# Altium PCB MotorBoard.PcbDoc
Units mm, origin at the board's own origin, x right, y up, seen from the top; angles counter-clockwise.
Board outline 85 x 80 mm, 4 copper layers (Top Layer, Gnd, DC Power, Bottom Layer), stack 1.782 mm thick; 113 components, 64 nets, 317 pads, 104 vias.
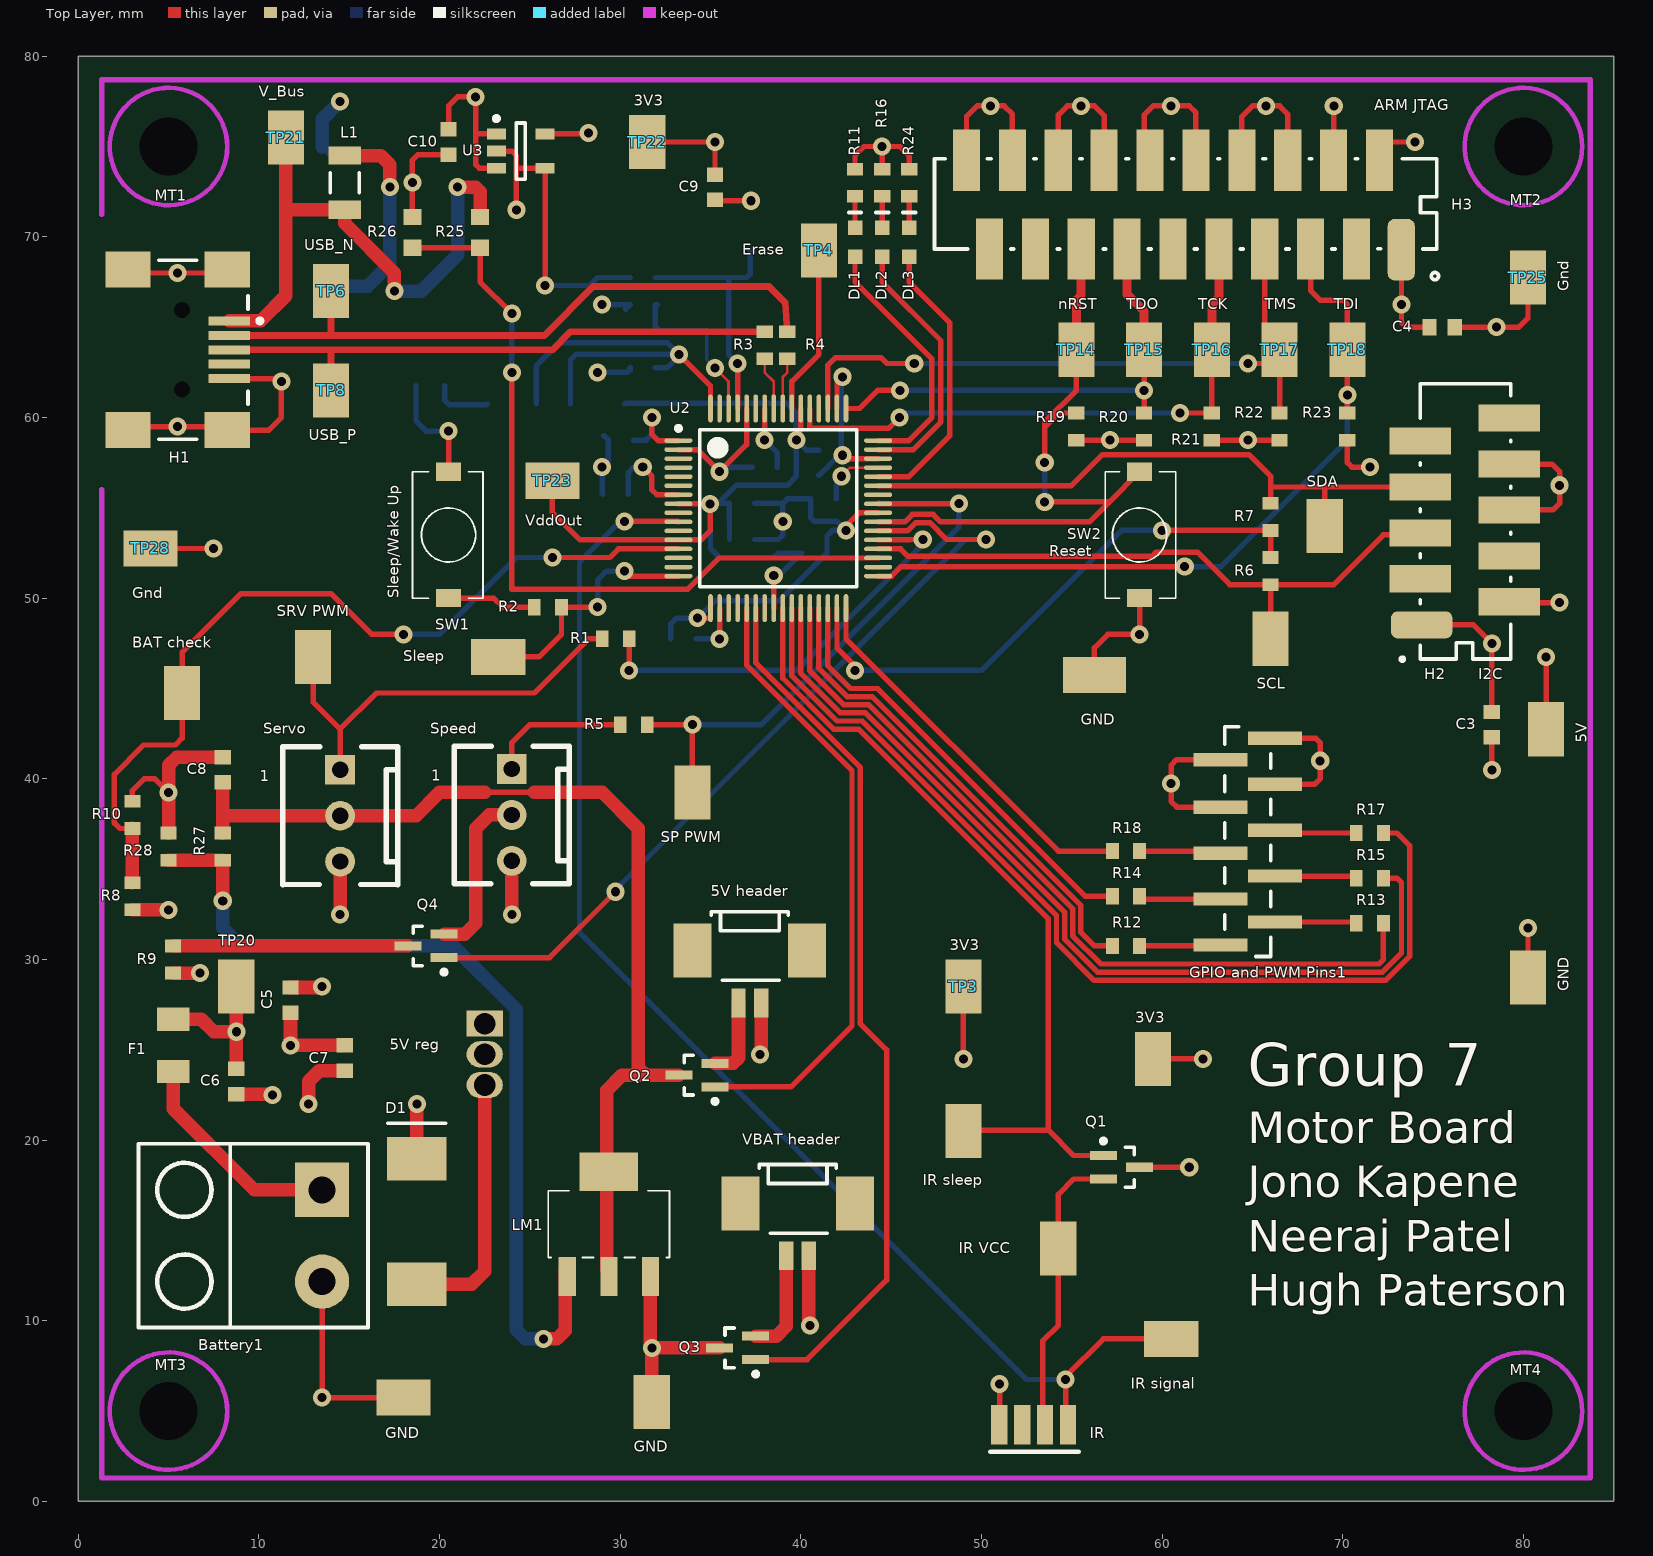
[diagram p0: Top Layer view]
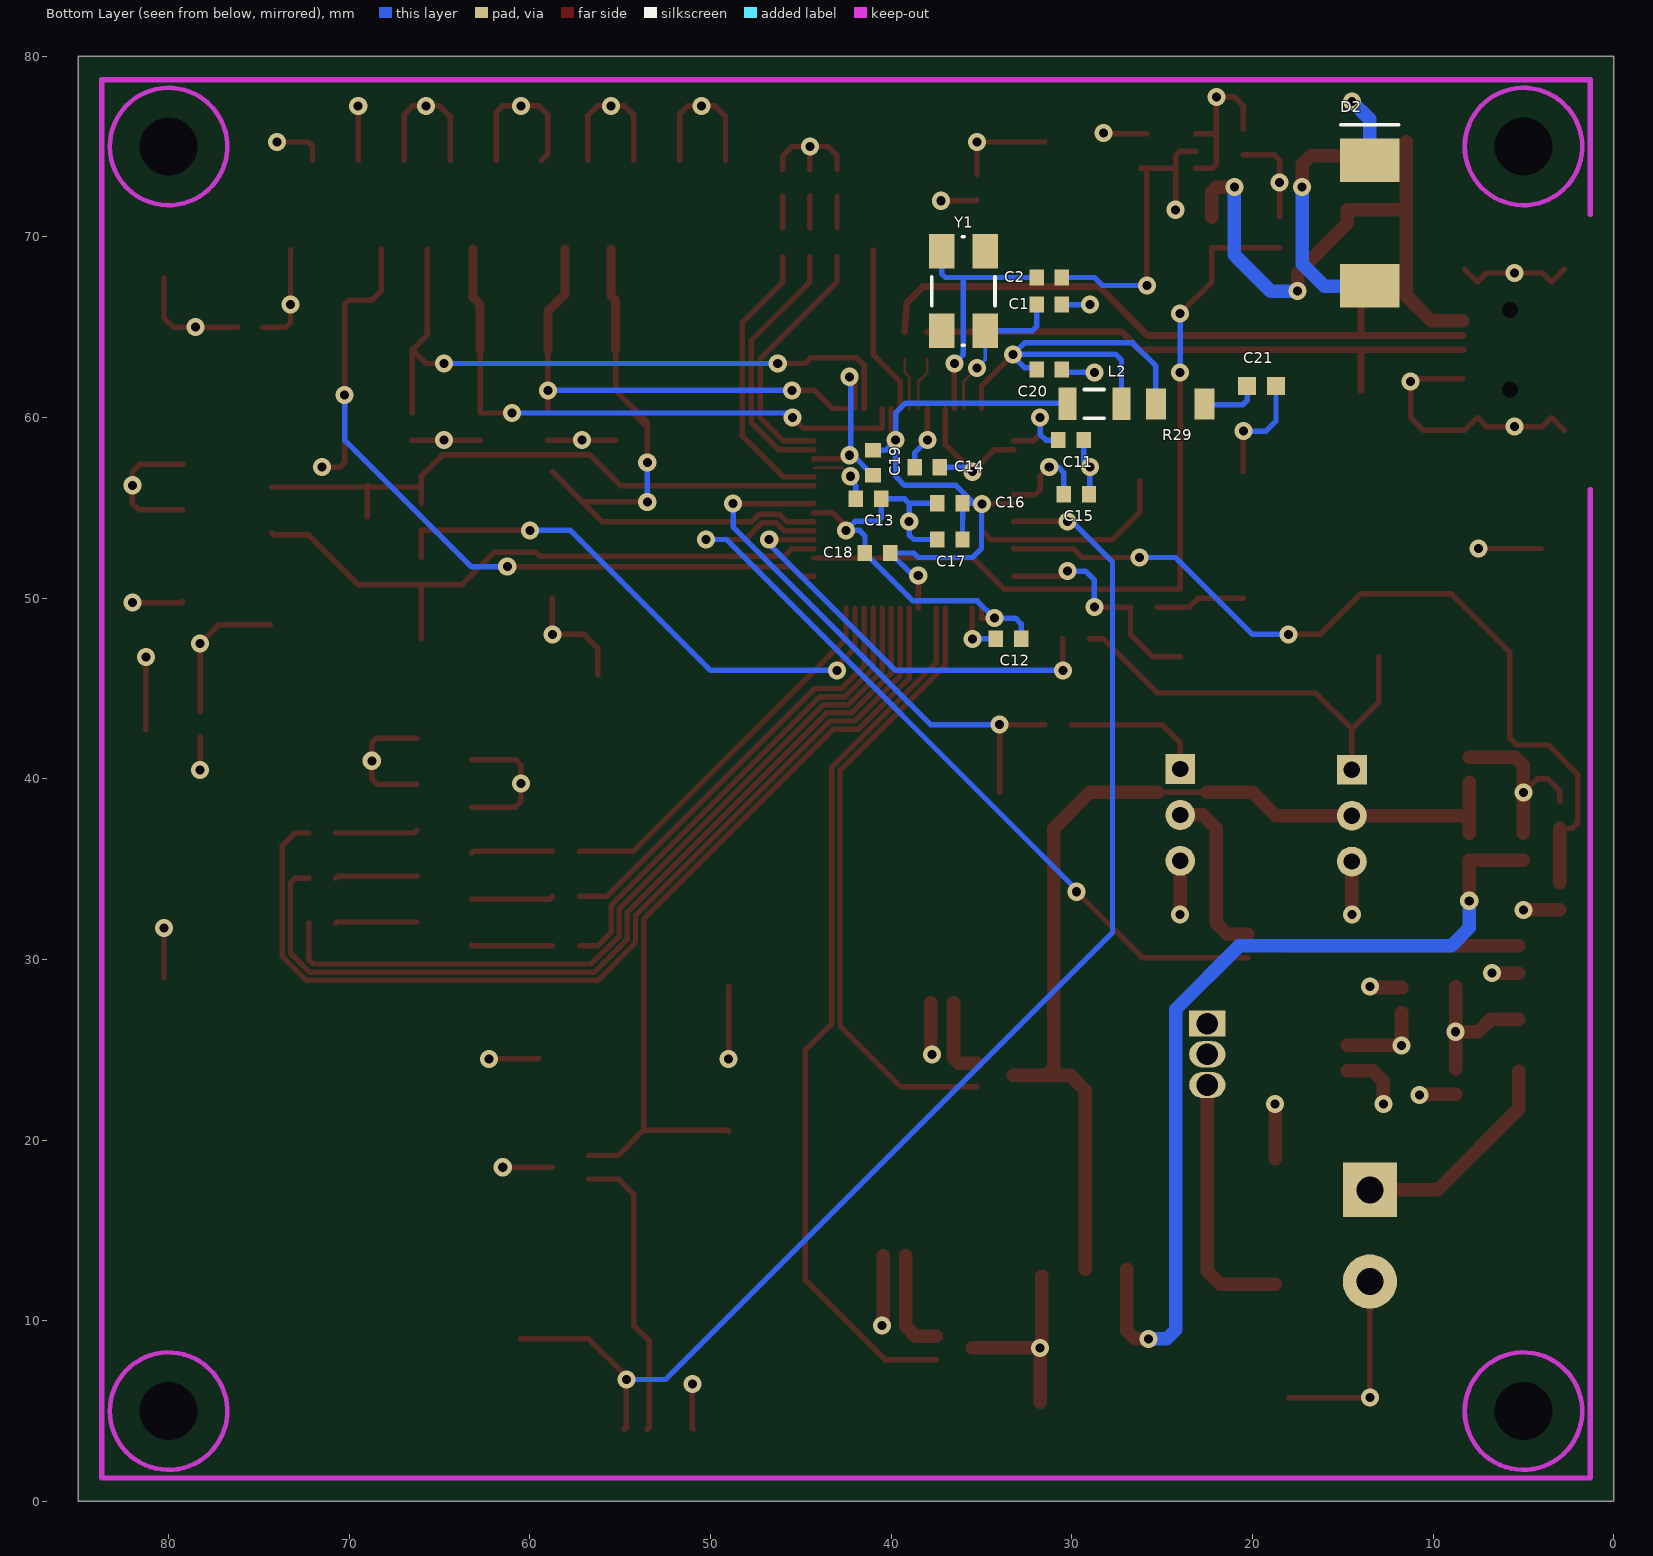
[diagram p1: Bottom Layer view, seen from below]
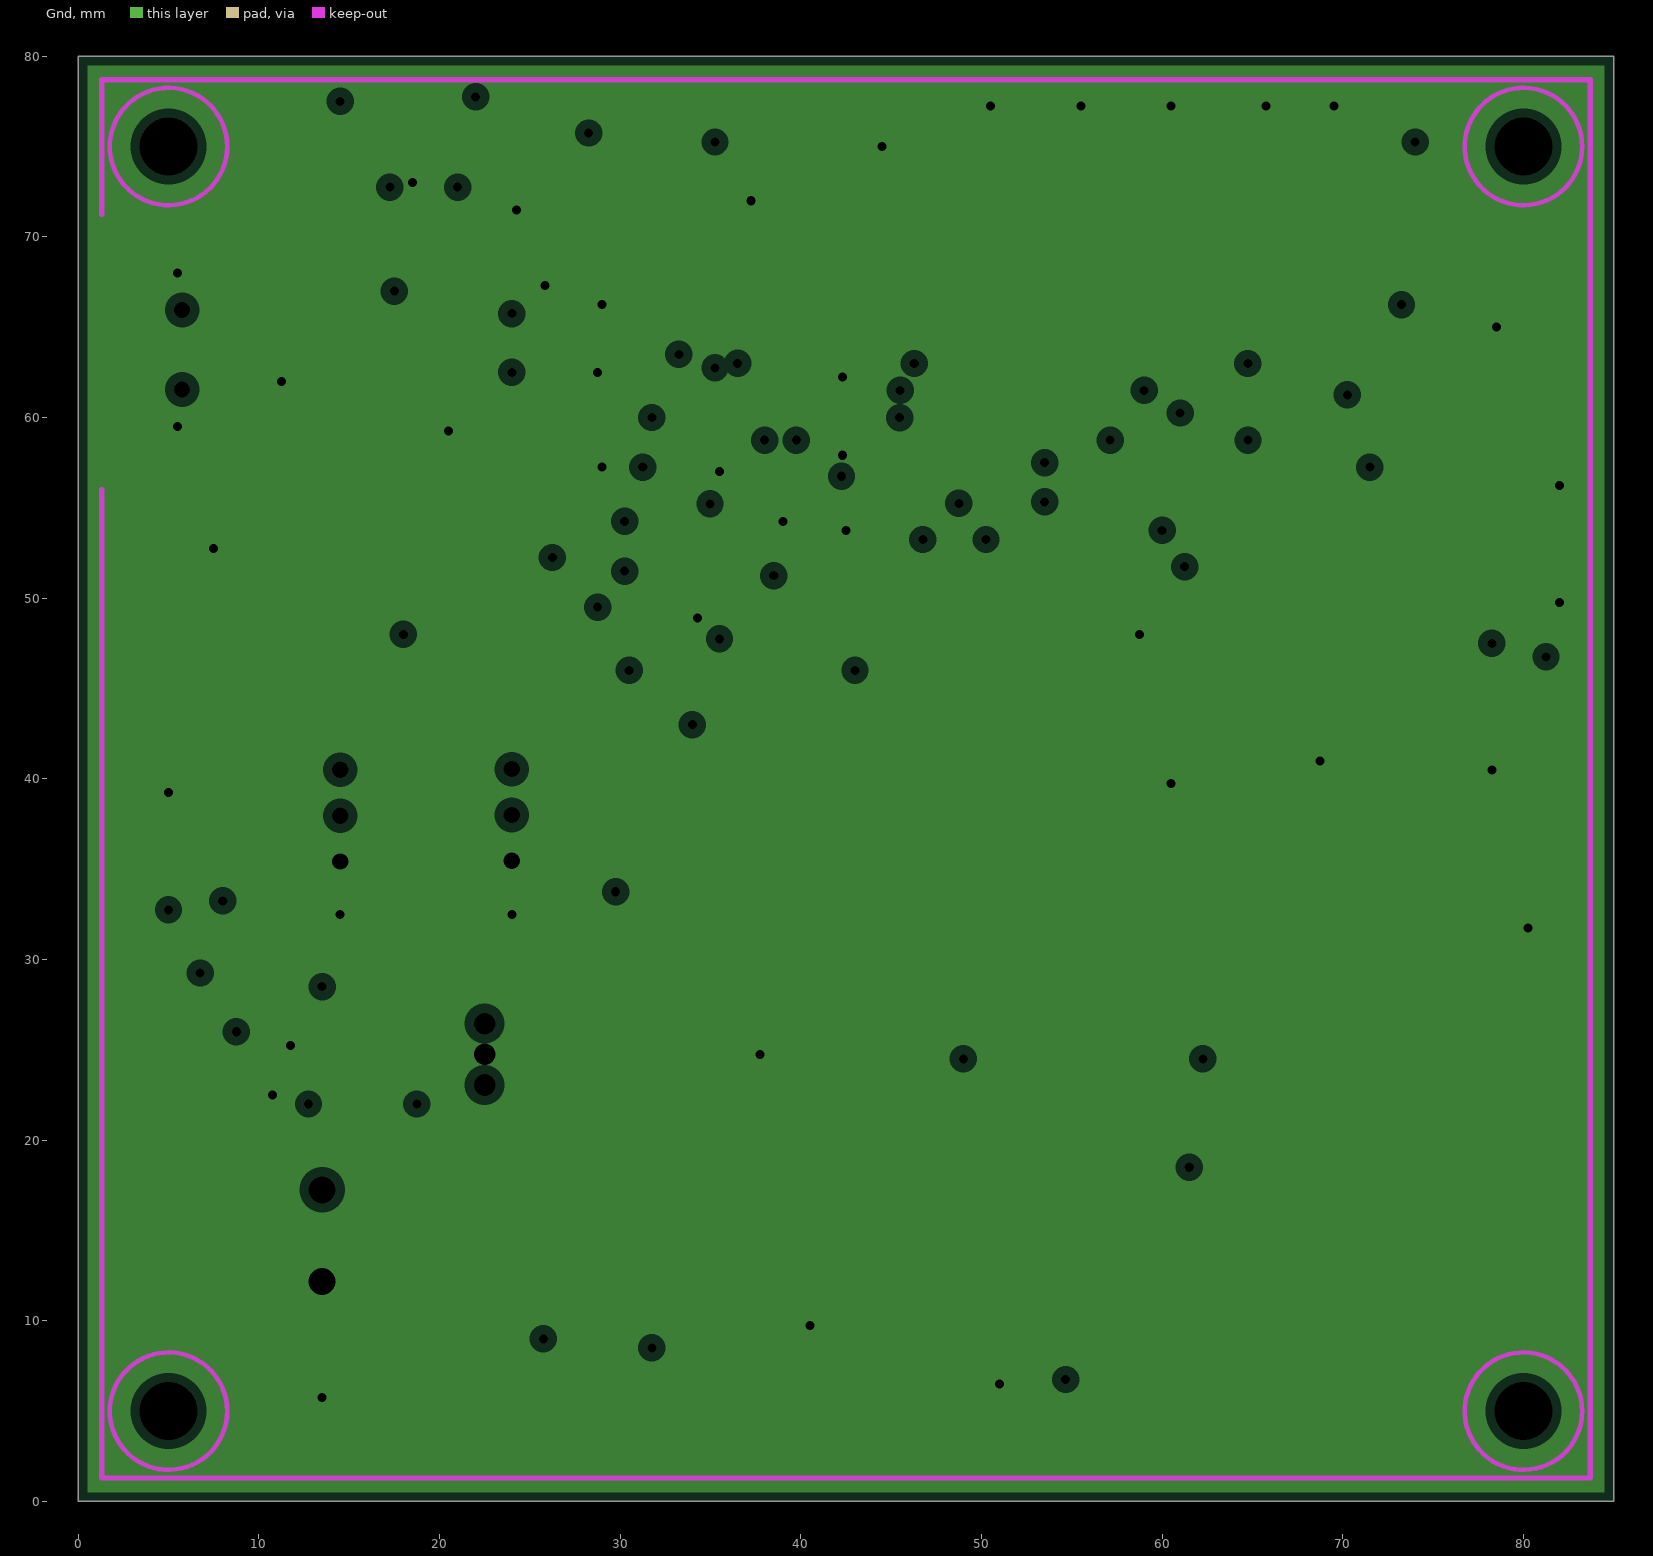
[diagram p2: Gnd, clearances drawn from the general rule]
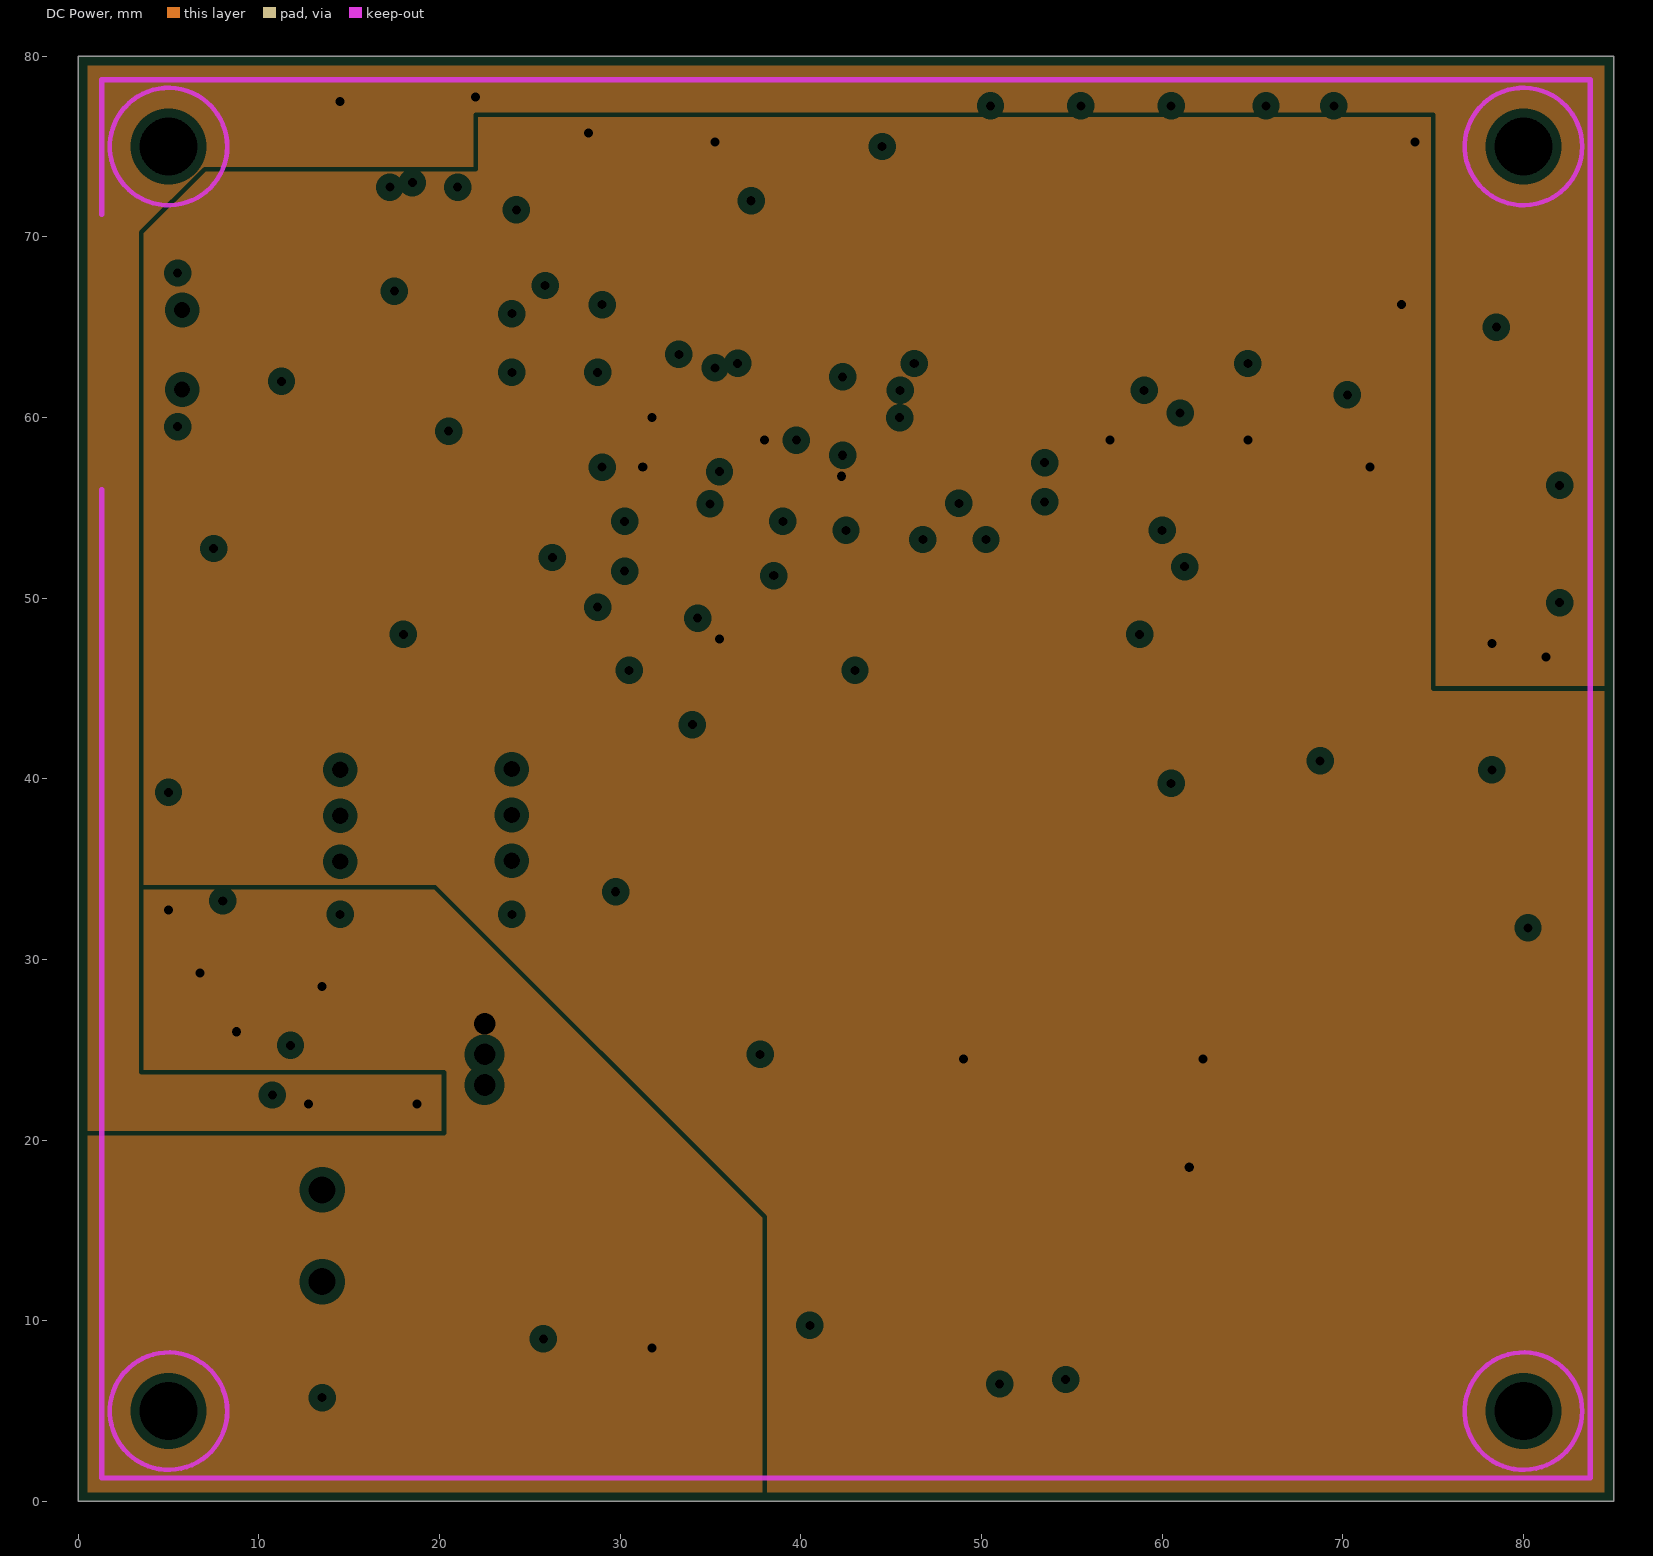
[diagram p3: DC Power, clearances drawn from the general rule]

## Layer stack, top to bottom
Top Solder: solder mask 0.0102, Solder Resist, Dk 3.5
Top Layer: signal copper 0.0356
Dielectric1: prepreg 0.32, FR-4, Dk 4.8
Gnd: plane copper 0.0356, net GND
Dielectric2: core 1, FR-4, Dk 4.8
DC Power: plane copper 0.0356, net +3V3
Dielectric3: prepreg 0.32, FR-4, Dk 4.8
Bottom Layer: signal copper 0.0356
Bottom Solder: solder mask 0.0102, Solder Resist, Dk 3.5

## Board outline
0,0 85,0 85,80 0,80

## Design rules (kind name [scope] priority, off if disabled: settings)
Clearance Min_Clearance_Circuit_Labs [All] p1: gap=0.15
DiffPairsRouting [All] p1: maxlimit=0.254 minlimit=0.254 mostfreqgap=0.254 toplayer_minwidth=0.381 toplayer_maxwidth=0.381 toplayer_prefwidth=0.381 bottomlayer_minwidth=0.381 bottomlayer_maxwidth=0.381 bottomlayer_prefwidth=0.381 maxuncoupledlength=12.7
FanoutControl Fanout_BGA [IsBGA] p1 off: bgadir=Out bgaviamode=Centered fanoutstyle=Auto fanoutdirection=Alternating viagrid=0.025 // Fanout_BGA (Default Rule)
HoleSize [All] p1: absolutevalues=TRUE maxlimit=10 minlimit=0.3 maxpercent=80.000 minpercent=20.000
MinimumAnnularRing [All] p1: minimumring=0.1
MinimumSolderMaskSliver MinimumSolderMaskSliver_1 [All] p1 off: minsoldermaskwidth=0.25
NetAntennae [All] p1: netantennaetolerance=1
PasteMaskExpansion [All] p1 off: expansion=0.2
PlaneClearance [All] p1: clearance=0.508
PlaneConnect [All] p1: planeconnectstyle=Relief reliefexpansion=0.508 reliefentries=4 reliefconductorwidth=0.254 reliefairgap=0.254
PolygonConnect [All] p1: connectstyle=Relief reliefconductorwidth=0.254 reliefentries=4 polygonreliefangle="90 Angle" airgapwidth=0.254
RoutingVias [All] p1: holewidth=0.5 width=1 viastyle="Through Hole" minholewidth=0.3 minwidth=0.6 maxholewidth=1 maxwidth=2
SMDNeckDown [All] p1 off: percent=50.000
SMDToCorner [All] p1: distance=98425
SMDToPlane [All] p1: distance=1968504
SilkToSolderMaskClearance SilkscreenOverComponentPads [IsPad] p1: minsilkscreentomaskgap=0.254 clearancetoexposedcopper=TRUE
SolderMaskExpansion [All] p1: expansion=0.102
ViasUnderSMD [All] p1: allowed=FALSE
Width [All] p1: maxlimit=2 minlimit=0.15 preferedwidth=0.3
21 further rules are at their usual default settings.

## Classes and differential pairs
net class C17_Nets: GND VDDOUT
net class Y1_Nets: NetC1_2 NetC2_2
net class U2_Nets: +3V3 BAT_CHECK ERASE GND IR "IR SLEEP" LED1 LED2 LED3 NetC1_2 NetC2_2 NetC20_2 NetR2_1 NetR3_2 NetR4_2 NetR5_1 NetR6_2 NRST P1 P2 P3 PWM1 SCL SDA SPARE SPARE2 "SPEED SLEEP" SPIN1 SPIN2 SPIN3 TCK TDI TDO TMS "USB DETECT" VDDOUT
net class U1_Nets: GND IR NetQ1_2 NetU1_3 NetU1_4 NetU1_5 NetU1_6 NetU1_9 NetU1_10 NetU1_11 NetU1_13 NetU1_14 NetU1_15 NetU1_16 NetU1_19 NetU1_21 NetU1_22 NetU1_23 NetU1_25 NetU1_27 NetU1_29 NetU1_30 NetU1_32 NetU1_34 NetU1_37 NetU1_38 NetU1_41 NetU1_42 NetU1_52 NetU1_59 NetU1_63
net class TP16_Nets: TCK
net class TP15_Nets: TDO
net class TP14_Nets: NRST
net class TP13_Nets: SDA
net class TP12_Nets: BAT_CHECK
net class TP11_Nets: GND
net class TP10_Nets: SCL
net class TP8_Nets: USB_P
net class TP6_Nets: USB_N
net class TP5_Nets: NetR2_1
net class TP4_Nets: ERASE
net class TP3_Nets: +3V3
net class TP2_Nets: NetQ1_2
net class TP1_Nets: IR
net class SW2_Nets: GND NRST
net class SW1_Nets: GND NetR2_2
net class R16_Nets: GND NetDL2_1 NetR16_1
net class R15_Nets: "NetGPIO and PWM Pins1_4" SPIN1
net class R14_Nets: "NetGPIO and PWM Pins1_3" P3
net class R13_Nets: "NetGPIO and PWM Pins1_2" P2
net class R12_Nets: "NetGPIO and PWM Pins1_1" P1
net class R11_Nets: GND NetDL1_1
net class R10_Nets: BAT_CHECK GND
net class R9_Nets: NetQ4_3 VBAT
net class R8_Nets: BAT_CHECK VBAT
net class R7_Nets: NetR6_2 SDA
net class R6_Nets: NetR6_2 SCL
net class R5_Nets: NetR5_1 NetR5_2
net class R4_Nets: NetR4_2 USB_N
net class R3_Nets: NetR3_2 USB_P
net class R2_Nets: NetR2_1 NetR2_2
net class R1_Nets: NetR1_1 PWM1
net class L2_Nets: NetC20_2 VDDOUT
net class L1_Nets: NetD2_1 VBUS
net class H3_Nets: +3V3 GND NetH3_3 NetH3_11 NetH3_17 NetH3_19 NRST TCK TDI TDO TMS
net class H2_Nets: +5V GND NetH2_3 NetH2_4 NetH2_9 NetH2_10 SCL SDA
net class H1_Nets: GND NetH1_4 USB_N USB_P VBUS
net class DL3_Nets: LED3 NetDL3_1
net class DL2_Nets: LED2 NetDL2_1
net class DL1_Nets: LED1 NetDL1_1
net class C16_Nets: GND VDDOUT
net class C15_Nets: +3V3 GND
net class C14_Nets: +3V3 GND
net class C13_Nets: +3V3 GND
net class C12_Nets: +3V3 GND
net class C11_Nets: +3V3 GND
net class C10_Nets: +5V GND
net class C9_Nets: +3V3 GND
net class C8_Nets: GND "SERVO POWER"
net class C7_Nets: +5V GND
net class C6_Nets: GND VBAT
net class C5_Nets: GND VBAT
net class C4_Nets: +3V3 GND
net class C3_Nets: +5V GND
net class C2_Nets: GND NetC2_2
net class C1_Nets: GND NetC1_2
component class MotorBoard_PowerDistribution: 3V3 5V "5V reg" C5 C6 C7 C8 C9 C10 C11 C12 C13 C14 C15 C16 C17 C18 C19 C20 C21 D1 D2 GND L1 L2 LM1 R27 R28 R29 TP20 TP21 TP22 TP23 TP25 TP27 TP28 U3
component class MotorBoard: "5V Header" "BAT check" Battery1 C1 C2 C3 C4 DL1 DL2 DL3 F1 GND "GPIO and PWM Pins1" H1 H2 H3 IR "IR signal" "IR sleep" "IR VCC" MT1 MT2 MT3 MT4 Q1 Q2 Q3 Q4 R1 R2 R3 R4 R5 R6 R7 R8 R9 R10 R11 R12 R13 R14 R15 R16 R17 R18 R19 R20 R21 R22 R23 R24 R25 R26 SCL SDA Servo Sleep "SP PWM" Speed "SRV PWM" SW1 SW2 TP3 TP4 TP6 TP8 TP14 TP15 TP16 TP17 TP18 U2 "VBAT header" Y1
net class Battery1_Nets: GND NetBattery1_1
net class C18_Nets: GND VDDOUT
net class C19_Nets: GND VDDOUT
net class C20_Nets: GND NetC20_2
net class C21_Nets: GND NetC21_2
net class "Choose header spare 1_Nets": GND "NetChoose header spare 1_2"
net class "Choose header spare batt1_Nets": GND "NetChoose header spare batt1_2"
net class D1_Nets: +5V "Net5V reg_3"
net class D2_Nets: +5V NetD2_1
net class F1_Nets: NetBattery1_1 VBAT
net class "GPIO and PWM Pins1_Nets": GND "NetGPIO and PWM Pins1_1" "NetGPIO and PWM Pins1_2" "NetGPIO and PWM Pins1_3" "NetGPIO and PWM Pins1_4" "NetGPIO and PWM Pins1_5" "NetGPIO and PWM Pins1_6"
net class Q1_Nets: +3V3 "IR SLEEP" NetQ1_2
net class Q2_Nets: "NetChoose header spare 1_2" "SERVO POWER" SPARE2
net class Q3_Nets: "NetChoose header spare batt1_2" SPARE VBAT
net class Q4_Nets: NetQ4_2 NetQ4_3 "SPEED SLEEP"
net class R17_Nets: "NetGPIO and PWM Pins1_6" SPIN3
net class R18_Nets: "NetGPIO and PWM Pins1_5" SPIN2
net class R19_Nets: +3V3 NRST
net class R20_Nets: +3V3 TDO
net class R21_Nets: +3V3 TCK
net class R22_Nets: +3V3 TMS
net class R23_Nets: +3V3 TDI
net class R24_Nets: GND NetDL3_1
net class R25_Nets: "USB DETECT" VBUS
net class R26_Nets: GND "USB DETECT"
net class R29_Nets: NetC20_2 NetC21_2
net class Servo1_Nets: GND NetR1_1 "SERVO POWER"
net class Speed1_Nets: GND NetQ4_2 NetR5_2
net class TP17_Nets: TMS
net class TP18_Nets: TDI
net class TP19_Nets: VBAT
net class TP20_Nets: VBAT
net class TP21_Nets: VBUS
net class TP22_Nets: +3V3
net class TP23_Nets: VDDOUT
net class TP24_Nets: +3V3
net class TP25_Nets: GND
net class TP27_Nets: GND
net class TP28_Nets: GND
net class U3_Nets: +3V3 +5V GND NetU4_4
net class LM1_Nets: NetLM1_1 "SERVO POWER" VBAT
net class R27_Nets: NetLM1_1 "SERVO POWER"
net class R28_Nets: GND NetLM1_1
net class GND_Nets: GND
net class TP_5V_Nets: +5V
net class TP_SP_PWM_Nets: NetR5_1
net class TP_SRV_PWM_Nets: NetR1_1
net class "5V reg_Nets": GND "Net5V reg_3" VBAT
net class TP_IR_sleep?_Nets: "IR SLEEP"
differential pair USB: +USB_P -USB_N

## Components (designator, comment, footprint, x,y, rotation, side; value= is the part's Value field where it differs from the comment)
3V3 "USB_N" TP_0805 59.5,24.5 r90 top (schematic designator TP24)
5V "USB_N" TP_0805 81.25,42.75 r90 top (schematic designator TP_5V)
"5V header" "SMD 1.25mm Horiz" SD-53261-0219 37.8,27.6 r0 top (schematic designator "Choose header spare 1")
"5V reg" "UC383 5" UC383-5 22.5,26.45 r270 top
"BAT check" "USB_N" TP_0805 5.75,44.75 r90 top (schematic designator TP12)
Battery1 "JA_TERM_BLK_HDR_2 PIN" TMHDR2 13.5,17.25 r270 top
C1 "10pF" CAPC1608L 31.25,66.25 r0 bottom
C2 "10pF" CAPC1608L 31.25,67.75 r0 bottom
C3 "100nF" CAPC1608L 78.25,43 r90 top
C4 "100nF" CAPC1608L 75.5,65 r180 top
C5 "10uF" CAPC1608L 11.75,27.75 r90 top
C6 "10uF" CAPC1608L 8.75,23.25 r270 top
C7 "10uF" CAPC1608L 14.75,24.55 r90 top
C8 "10uF" CAPC1608L 8,40.5 r90 top
C9 "10uF" CAPC1608L 35.25,72.75 r270 top
C10 "10uF" CAPC1608L 20.5,75.25 r270 top
C11 "100nF" CAPC1608L 30.05,58.75 r0 bottom
C12 "100nF" CAPC1608L 33.5,47.75 r0 bottom
C13 "100nF" CAPC1608L 41.25,55.5 r0 bottom
C14 "100nF" CAPC1608L 38,57.25 r0 bottom
C15 "100nF" CAPC1608L 29.75,55.75 r0 bottom
C16 "100nF" CAPC1608L 36.75,55.25 r180 bottom
C17 "100nF" CAPC1608L 36.75,53.25 r180 bottom
C18 "100nF" CAPC1608L 40.75,52.5 r180 bottom
C19 "100nF" CAPC1608L 41,57.5 r90 bottom
C20 "100nF" CAPC1608L 31.25,62.654 r0 bottom
C21 "4.7uF" CAPC1608N 19.5,61.75 r0 bottom
D1 "VS-30BQ015TRPBF" SMC 18.75,15.5 r90 top
D2 "VS-30BQ015TRPBF" SMC 13.5,70.775 r90 bottom
DL1 "Dark Green" WL-SMCW0603 43,70.5 r270 top
DL2 "Yellow" WL-SMCW0603 44.5,70.5 r270 top
DL3 "Red" WL-SMCW0603 46,70.5 r270 top
F1 "5A" RESC3216N 5.25,25.25 r90 top
GND "USB_N" TP_0805 18,5.75 r180 top (schematic designator TP11)
GND "USB_N" TP_0805 31.75,5.5 r90 top (schematic designator TP19)
GND "USB_N" TP_0805 80.25,29 r90 top (schematic designator TP27)
GND "TP" TP_1206 56.25,45.75 r0 top (schematic designator TP?)
"GPIO and PWM Pins1" "HDR SIL SMT" M52-040000P1045 64.739,36.526 r90 top
H1 "JS_USB_MINI_B" USB/SM0.8-6H5 0.5,63.75 r180 top
H2 "I2C" 188275-10 76.75,54.25 r90 top
H3 "ARM JTAG" 188275-20 61.235,71.789 r180 top
IR "TSOP6136TR" PCBComponent_1 50.98,4.25 r0 top (schematic designator U1)
"IR signal" "Gnd" TP_0805 60.5,9 r0 top (schematic designator TP1)
"IR sleep" "USB_N" TP_0805 49,20.5 r90 top (schematic designator TP_IR_sleep?)
"IR VCC" "USB_N" TP_0805 54.25,14 r90 top (schematic designator TP2)
L1 "Ferrite Bead" INDC3216L 14.75,73 r90 top
L2 "Ferrite Bead" INDC3216L 28.75,60.75 r0 bottom
LM1 "Surface mount regulator, texas instruments" LM317 29.372,15.354 r0 top
MT1 "M3.2 NPTH" MNT-HOLE_3.2mm_NPTH 5,75 r0 top
MT2 "M3.2 NPTH" MNT-HOLE_3.2mm_NPTH 80,75 r0 top
MT3 "M3.2 NPTH" MNT-HOLE_3.2mm_NPTH 5,5 r0 top
MT4 "M3.2 NPTH" MNT-HOLE_3.2mm_NPTH 80,5 r0 top
Q1 "BC817W" SOT323_M 57.75,18.5 r0 top
Q2 "BC817W" SOT323_M 34.25,23.6 r180 top
Q3 "BC817W" SOT323_M 36.5,8.5 r180 top
Q4 "BC817W" SOT323_M 19.25,30.75 r180 top
R1 "220R" RESC1608L 29.75,47.75 r0 top
R2 "2K2" RESC1608L 26,49.5 r180 top
R3 "27R" RESC1608L 38,64 r270 top
R4 "27R" RESC1608L 39.25,64 r270 top
R5 "220R" RESC1608L 30.75,43 r180 top
R6 "2K2" RESC1608L 66,51.5 r90 top
R7 "2K2" RESC1608L 66,54.5 r270 top
R8 "100K" RESC1608L 3,33.5 r90 top
R9 "220R" RESC1608L 5.25,30 r270 top
R10 "62K" RESC1608L 3,38 r270 top
R11 "62R" RESC1608L 43,73 r90 top
R12 "220R" RESC1608L 58,30.75 r0 top
R13 "220R" RESC1608L 71.5,32 r0 top
R14 "220R" RESC1608L 58,33.5 r180 top
R15 "220R" RESC1608L 71.5,34.5 r0 top
R16 "220R" RESC1608L 44.5,73 r90 top
R17 "220R" RESC1608L 71.5,37 r0 top
R18 "220R" RESC1608L 58,36 r180 top
R19 "100K" RESC1608L 55.25,59.5 r270 top
R20 "100K" RESC1608L 59,59.5 r270 top
R21 "100K" RESC1608L 62.75,59.5 r270 top
R22 "100K" RESC1608L 66.5,59.5 r270 top
R23 "100K" RESC1608L 70.25,59.5 r270 top
R24 "220R" RESC1608L 46,73 r90 top
R25 "27K" RESC1608N 22.25,70.25 r90 top
R26 "47K" RESC1608N 18.5,70.25 r270 top
R27 "240K" RESC1608L 8,36.25 r90 top
R28 "51K" RESC1608L 5,36.25 r270 top
R29 "1R" RESC3216L 24,60.75 r0 bottom
SCL "USB_N" TP_0805 66,47.75 r90 top (schematic designator TP10)
SDA "USB_N" TP_0805 69,54 r90 top (schematic designator TP13)
Servo "3 Pin Molex KK Hdr" MOLEX_KK_3_HDR 14.5,40.5 r270 top (schematic designator Servo1)
Sleep "USB_N" TP_0805 23.25,46.75 r0 top (schematic designator TP5)
"SP PWM" "USB_N" TP_0805 34,39.25 r90 top (schematic designator TP_SP_PWM)
Speed "3 Pin Molex KK Hdr" MOLEX_KK_3_HDR 24,40.54 r270 top (schematic designator Speed1)
"SRV PWM" "USB_N" TP_0805 13,46.75 r90 top (schematic designator TP_SRV_PWM)
SW1 "Sleep/Wake Up" KSR211G 20.5,50 r90 top
SW2 "Reset" KSR211G 58.75,57 r270 top
TP3 "3V3" TP_0805 49,28.5 r90 top
TP4 "Erase" TP_0805 41,69.25 r90 top
TP6 "USB_N" TP_0805 14,67 r90 top
TP8 "USB_P" TP_0805 14,61.5 r90 top
TP14 "nRST" TP_0805 55.25,63.75 r90 top
TP15 "TDO" TP_0805 59,63.75 r90 top
TP16 "TCK" TP_0805 62.75,63.75 r90 top
TP17 "TMS" TP_0805 66.5,63.75 r90 top
TP18 "TDI" TP_0805 70.25,63.75 r90 top
TP20 "USB_N" TP_0805 8.75,28.5 r90 top
TP21 "V_Bus" TP_0805 11.5,75.5 r90 top
TP22 "3V3" TP_0805 31.5,75.25 r270 top
TP23 "VddOut" TP_0805 26.25,56.5 r0 top
TP25 "Gnd" TP_0805 80.25,67.75 r90 top
TP28 "Gnd" TP_0805 4,52.75 r0 top
U2 "ATSAM4S8BA-ANR" LQFP64_L 38.75,54.975 r0 top
U3 "TLV70233DBVR" SOT95P280X145-5N 24.5,74.75 r0 top
"VBAT header" "SMD 1.25mm Horiz" SD-53261-0219 40.45,13.6 r0 top (schematic designator "Choose header spare batt1")
Y1 "18.432MHz" 6.0X3.5-4 36,67 r270 bottom

## Footprints (in the part's own frame and the unit in brackets; to place one, negate y for a bottom-side part, rotate by r counter-clockwise, add the part's x,y. Pads: shape width x height; smd on the part's side, far side on the other; paste and mask are expansions set on the pad)
6.0X3.5-4 [mm] "4 SMD 6.0X3.5 mm No Lead Crystal"
  rect 1.9x1.4 smd: 1(-2.2,-1.2) 2(2.2,-1.2) 3(2.2,1.2) 4(-2.2,1.2)
  silkscreen extent -3,-1.75 3,1.75, body extent -3,-1.75 3,1.75, height 1.2
188275-10 [mm] "MicroMatch Ribbon Connector 10 way"
  rrect50% 1.5x3.4 smd: 1(-5.724,2.385)
  rect 1.5x3.4 smd: 2(-4.445,-2.461) 3(-3.175,2.461) 4(-1.905,-2.461) 5(-0.635,2.461) 6(0.635,-2.461) 7(1.905,2.461) 8(3.175,-2.461) 9(4.445,2.461) 10(5.715,-2.461)
  silkscreen extent -7.74,-2.55 7.62,3.57, body extent -7.62,-2.5 7.64,2.43, height 8.45
188275-20 [mm] "MicroMatch Ribbon Connector 20 way"
  rrect50% 1.5x3.4 smd: 1(-12,2.5)
  rect 1.5x3.4 smd: 2(-10.795,-2.461) 3(-9.525,2.461) 4(-8.255,-2.461) 5(-6.985,2.461) 6(-5.715,-2.461) 7(-4.445,2.461) 8(-3.175,-2.461) 9(-1.905,2.461) 10(-0.635,-2.461) 11(0.635,2.461) 12(1.905,-2.461) 13(3.175,2.461) 14(4.445,-2.461) 15(5.715,2.461) 16(6.985,-2.461) 17(8.255,2.461) 18(9.525,-2.461) 19(10.795,2.461) 20(12.065,-2.461)
  silkscreen extent -14.06,-2.54 13.83,4.16, body extent -13.96,-2.54 13.93,2.46, height 8.45
CAPC1608L [mm] "Chip Capacitor, Body 1.6x0.8mm, IPC High Density"
  rect 0.8x0.9 smd: 1(-0.7,0) 2(0.7,0)
  body extent -0.87,-0.48 0.87,0.48, height 0.85
CAPC1608N [mm] "Chip Capacitor, Body 1.6x0.8mm, IPC Medium Density"
  rect 1x1 smd: 1(-0.8,0) 2(0.8,0)
  body extent -0.87,-0.48 0.87,0.48, height 0.85
INDC3216L [mm] "Chip Inductor, Body 3.2x1.6mm, IPC High Density"
  rect 1x1.8 smd: 1(-1.5,0) 2(1.5,0)
  silkscreen extent -0.55,-0.8 0.55,0.8, body extent -1.75,-0.95 1.75,0.95, height 1.9
KSR211G [mm] "Subminature Tactile Switch in SMT"
  rect 1x1.4 smd: 1(0,0) 2(7,0)
  silkscreen extent 0,-1.9 7,2, body extent 0,-1.9 7,2, height 4.25
LM317 [mm] "Texas Instruments 3 terminal adjustable regulator"
  rect 0.95x2.15 smd: 1(-2.3,-2.9) 2(0,-2.9) 3(2.3,-2.9)
  rect 3.25x2.15 smd: 4(0,2.9)
  silkscreen extent -3.35,-1.85 3.35,1.85, body extent -3.3,-1.8 3.3,1.8, height 2.6
LQFP64_L [mm] "Thin QFP, 64-Leads, Body 10x10mm, Pitch 0.5mm, IPC High Density"
  oval 1.55x0.25 smd mask+0.07: 1(-5.525,3.75) 2(-5.525,3.25) 3(-5.525,2.75) 4(-5.525,2.25) 5(-5.525,1.75) 6(-5.525,1.25) 7(-5.525,0.75) 8(-5.525,0.25) 9(-5.525,-0.25) 10(-5.525,-0.75) 11(-5.525,-1.25) 12(-5.525,-1.75) 13(-5.525,-2.25) 14(-5.525,-2.75) 15(-5.525,-3.25) 16(-5.525,-3.75) 33(5.525,-3.75) 34(5.525,-3.25) 35(5.525,-2.75) 36(5.525,-2.25) 37(5.525,-1.75) 38(5.525,-1.25) 39(5.525,-0.75) 40(5.525,-0.25) 41(5.525,0.25) 42(5.525,0.75) 43(5.525,1.25) 44(5.525,1.75) 45(5.525,2.25) 46(5.525,2.75) 47(5.525,3.25) 48(5.525,3.75)
  oval 0.25x1.55 smd mask+0.07: 17(-3.75,-5.525) 18(-3.25,-5.525) 19(-2.75,-5.525) 20(-2.25,-5.525) 21(-1.75,-5.525) 22(-1.25,-5.525) 23(-0.75,-5.525) 24(-0.25,-5.525) 25(0.25,-5.525) 26(0.75,-5.525) 27(1.25,-5.525) 28(1.75,-5.525) 29(2.25,-5.525) 30(2.75,-5.525) 31(3.25,-5.525) 32(3.75,-5.525) 49(3.75,5.525) 50(3.25,5.525) 51(2.75,5.525) 52(2.25,5.525) 53(1.75,5.525) 54(1.25,5.525) 55(0.75,5.525) 56(0.25,5.525) 57(-0.25,5.525) 58(-0.75,5.525) 59(-1.25,5.525) 60(-1.75,5.525) 61(-2.25,5.525) 62(-2.75,5.525) 63(-3.25,5.525) 64(-3.75,5.525)
  silkscreen extent -5.65,-4.35 4.35,4.55, body extent -5,-5 5,5, height 1.6
M52-040000P1045 [mm] "1.27mm SIL SMT 10 way Pin Header"
  rect 0.74x3 smd: 1(-5.724,1.511) 2(-4.452,-1.511) 3(-3.18,1.511) 4(-1.908,-1.511) 5(-0.636,1.511) 6(0.636,-1.511) 7(1.908,1.511) 8(3.18,-1.511) 9(4.531,1.511) 10(5.724,-1.511)
  silkscreen extent -6.36,-1.27 6.36,1.27, body extent -6.36,-1.27 6.36,1.27, height 7.77
MNT-HOLE_3.2mm_NPTH [mm] "Mounting Hole 3.2mm non plated"
  round 0 hole 3.2 unplated: 1(0,0)
  Keep-Out Layer circle w0.254: c0,0 r3.25
MOLEX_KK_3_HDR [mil] "MOLEX_KK_3_HDR"
  rect 65x65 hole 35.43: 1(0,0)
  round 65 hole 35.43: 2(100,0) 3(200,0)
  silkscreen extent -50,-125 250,125, body extent -44,-120 244,119, height 630
PCBComponent_1 [mm]
  rect 0.9x2.2 smd: 1(0,0) 2(1.27,0) 3(2.54,0) 4(3.81,0)
  silkscreen extent -0.5,-1.5 4.4,-1.5
RESC1608L [mm] "Chip Resistor, Body 1.6x0.8mm, IPC High Density"
  rect 0.7x0.9 smd: 1(-0.75,0) 2(0.75,0)
  body extent -0.85,-0.48 0.85,0.48, height 0.9
RESC1608N [mm] "Chip Resistor, Body 1.6x0.8mm, IPC Medium Density"
  rect 0.9x1 smd: 1(-0.85,0) 2(0.85,0)
  body extent -0.85,-0.48 0.85,0.48, height 0.6
RESC3216L [mm] "Chip Resistor, Body 3.1x1.6mm, IPC High Density"
  rect 1.1x1.7 smd: 1(-1.35,0) 2(1.35,0)
  body extent -1.68,-0.87 1.68,0.87, height 2.54
RESC3216N [mm] "Chip Resistor, Body 3.2x1.6mm, IPC Medium Density"
  rect 1.3x1.8 smd: 1(-1.45,0) 2(1.45,0)
  body extent -1.68,-0.87 1.68,0.87, height 0.71
SD-53261-0219 [mm] "Molex Pico Blade 2 Pos Horiz SMD Header"
  rect 0.8x1.6 smd: 1(0,0) 2(-1.25,0)
  rect 2.1x3 smd: M(-3.8,2.9) M(2.55,2.9)
  silkscreen extent -2.75,1.25 1.5,5.05, body extent -2.66,1.13 1.41,4.95, height 3.45
SMC [mm] "DO-214-AB/SMC; 2 C-Bend Leads; Body 7.9 x 5.9 mm, inc. leads (LxW)"
  rect 2.4x3.3 smd: 1(-3.475,0) 2(3.475,0)
  silkscreen extent 5.43,-1.6 5.43,1.6
SOT95P280X145-5N [mm] "SOT23, 5-Leads, Body 2.90x2.80mm, Pitch 0.95mm, IPC Medium Density"
  rect 1.05x0.6 smd: 1(-1.35,0.95) 2(-1.35,0) 3(-1.35,-0.95) 4(1.35,-0.95) 5(1.35,0.95)
  silkscreen extent -1.47,-1.55 0.25,1.92, body extent -0.87,-1.52 0.87,1.53, height 1.45
SOT323_M [mm] "SOT323, 3-Leads, Body 2.0x1.3mm, Pitch 0.65mm, Lead Span 2.1mm, IPC Low Density"
  rect 1.5x0.5 smd: 1(-1,0.65) 2(-1,-0.65) 3(1,0)
  silkscreen extent -1.12,-1.1 0.7,1.57, body extent -0.7,-1.1 0.7,1.1, height 1.1
TMHDR2 [mm] "5.08mm Pluggable Terminal Header"
  rect 3x3 hole 1.5: 1(0,0)
  round 3 hole 1.5: 2(5.08,0)
  silkscreen extent -2.54,-10.16 7.62,2.54, body extent -2.43,-10.07 7.51,2.42, height 7.8
TP_0805 [mm] "TestPoint SMD"
  rect 3x2 smd: 1(0,0)
  body extent -1.5,-1 1.5,1.1, height 1.4
TP_1206 [mm] "Test Point Pad"
  rect 3.5x2 smd: 1(0,0)
  body extent -1.8,-1.01 1.8,1.1, height 2
UC383-5 [mm] "TO-220 power package"
  rrect0% 1.45x2 hole 1.2 mask+0.07: 1(0,0)
  rrect100% 1.45x2 hole 1.2 mask+0.07: 2(1.7,0) 3(3.4,0)
USB/SM0.8-6H5 [mm] "Connector; USB2.0, Type B, SM; 5 Position; Right Angle"
  rect 2.3x0.5 smd mask+0.07: 1(-7.85,-1.6) 2(-7.85,-0.8) 3(-7.85,0) 4(-7.85,0.8) 5(-7.85,1.6)
  rect 2.5x2 smd: 6(-7.75,4.45) 7(-2.25,4.45) 8(-7.75,-4.45) 9(-2.25,-4.45)
  round 0.6 hole 0.9 unplated: MH1(-5.25,2.2) MH2(-5.25,-2.2)
  silkscreen extent -9.68,-4.95 -3.95,4.95, body extent -8.9,-4.95 0.7,4.95, height 3.9
WL-SMCW0603 [mm] "2.4 x 0.8 x 0.7mm LED"
  rect 0.8x0.8 smd: 1(0,0) 2(1.6,0)
  silkscreen extent -0.85,-0.35 -0.85,0.35

## Part data
3V3 5V "BAT check" GND GND GND "IR signal" "IR sleep" "IR VCC" SCL SDA Sleep "SP PWM" "SRV PWM" TP3 TP4 TP6 TP8 TP14 TP15 TP16 TP17 TP18 TP20 TP21 TP22 TP23 TP25 TP28: library part TP_0805, "Test Point 2.0X0.9X1.2mm SMD"
"5V header" "VBAT header": library part JB_53261-02, "Header_Horiz_2Pos_1.25mm_125V@1A_SMT"
Battery1: "TERM_BLK_HEADER 5.08mm 2 Pos R/A Thru Hole"
C1 C2: library part CC_10pF_0603, "CAP CER 10pF COG/NPO 50V 0603"
C3 C4 C11 C12 C13 C14 C15 C16 C17 C18 C19 C20: library part CC_100nF_0603, "CAP CER 100nF X7R +-10% 50V 0603"
C5 C6 C7 C8 C9 C10: library part CC_10uF_0603, "CAP CER 10UF X5R +-20% 10V 0603"
C21: library part CC_4.7uF_0603, "CAP CER 4.7uF X5R +-20%  10V 0603"
D1 D2: library part DS_VS-30BQD015TRPBF, "DIODE SCHOTTKY 15V 3A SMC"
DL1: library part DL_150060GS75000, "LED Dk Green 430mcd 0603 SMD"
DL2: library part DL_150060YS75000, "LED Yellow 120mcd 0603 SMD"
DL3: library part DL_150060RS75000, "LED Red 250mcd 0603 SMD"
F1: library part FS_Fuse_5.0A, "Fuse 5.0A Very Fast Acting 1206 SMD"
GND: library part TP_1206, "Test-Point 3.3x1.6x2.1mm SMD"
"GPIO and PWM Pins1": library part JB_M52H_10_1.27, "Header 1.27mm Pitch SIL 10 Way SMT"
H1: library part JS_USB_MINI_B_SMT, "USB 2.0, Right Angle, SMT, B Type, Receptacle, 5 Position,"
H2: library part JB_HDR_IDC_5X2_VERT, "IDC Header, 1,27mm, 10-Pin, Vert, SMT"
H3: library part JB_HDR_IDC_10X2_VERT, "IDC Header, 1,27mm, 20-Pin, Vert, SMT"
IR: "Infrared Receiver 36KHz"
L1 L2: library part IN_Ferrite-Bead, "Ferrite Bead, Rdc 0.3R, Z100MHZ 600R, Imax 1A, SMD 1206"
LM1: library part "LM317 ADJ"
MT1 MT2 MT3 MT4: library part MC_M3.2_HOLE, "Fixing M3.2 Mount Hole NPTH"
Q1 Q2 Q3 Q4: library part TB_BC817W, "NPN GP Bipolar Transistor 45V 500mA SOT323"
R1 R5 R9 R12 R13 R14 R15 R16 R17 R18 R24: library part RS_220R, "RES 220 OHM 1/10W 5% 0603 SMD"
R2 R6 R7: library part RS_2K2, "RES 2.2K OHM 1/10W 5% 0603 SMD"
R3 R4: library part RS_27R, "RES 27 OHM 1/10W 5% 0603 SMD"
R8 R19 R20 R21 R22 R23: library part RS_100K, "RES 100K OHM 1/10W 5% 0603 SMD"
R10: library part RS_62K, "RES 62.0K OHM 1/10W 5% 0603 SMD"
R11: library part RS_62R, "RES 62 OHM 1/10W 5% 0603 SMD"
R25: library part RS_27K, "RES 27K OHM 1/10W 5% 0603 SMD"
R26: library part RS_47K, "RES 47.0K OHM 1/10W 5% 0603 SMD"
R27: library part RS_240K, "RES 240K OHM 1/10W 5% 0603 SMD"
R28: library part RS_51K, "RES 51.0K OHM 1/10W 5% 0603 SMD"
R29: library part RT_1R, "RES 1R OHM 1/4W 5% 1206 SMD"
Servo Speed: library part JA_MOLEX_KK_3POS, "CONN HEADER 3POS 2.54mm VERT_Thru Hole"
SW1 SW2: library part "WS_KSR211G LFS", "SWITCH TACTILE SPST-NO SMD"
U2: library part SE_ATSAM4S16BA-MU, "IC MCU 32BIT 512KB FLASH 64LQFP"
U3: library part SV_TLV70233DBVR, "IC REG LDO 3.3V 0.3A SOT23-5"
Y1: library part XT_CRYSTAL_18.432MHz_13pF, "18.432 MHZ 4PF  6.0X3.5mm SMD"

## Via types
v1: diameter 1, hole 0.5, Top Layer to Bottom Layer, 91 vias
v2: diameter 1, hole 0.5, Top Layer to Bottom Layer, tented both sides, 13 vias

## Nets (pads, with @x,y where several pads share a name; then routed paths per layer and width w, separated by ;. In a path a pad name is that pad's centre, name@x,y a point inside that pad or via, vN(x,y) a via of type N, cw(c..) or ccw(c..) an arc to the next point about the centre after c; other vN are vias at no path point)
+3V3: 3V3.1 C4.2 C9.1 C11.2 C12.2 C13.2 C14.2 C15.2 H3.1 H3.2 Q1.3 R19.2 R20.2 R21.2 R22.2 R23.2 TP3.1 TP22.1 U2.1 U2.7 U2.18 U2.45 U2.58 U3.5 | length 57.4
  Top Layer w0.15: v2(42.25,56.75) 42.725,57.225 U2.45
  Top Layer w0.3: U3.5 28.2,75.7 v1(28.25,75.75) ; v1(31.25,57.25) 31.75,56.75 31.75,56 32.025,55.725 U2.7 ; TP22.1 v1(35.25,75.25) C9.1 ; v1(31.75,60) 31.75,59.067 32.092,58.725 U2.1 ; v1(35.5,47.75) U2.18 ; v2@37.998,58.75 v2@38,58.752 ; v2@38,58.5 v2(38,58.75) v2@38,58.752 ; U2.58 v2@38,58.752 ; v1(49,24.5) TP3.1 ; R19.2 v1(57.125,58.75) ; Q1.3 v1(61.5,18.5) v1@61.35,18.35 ; R20.2 v1(57.125,58.75) ; 3V3.1 v1(62.25,24.5) ; R21.2 v1@65,58.75 ; v1(64.75,58.75) v1@65,58.75 ; R22.2 v1@65,58.75 ; R23.2 70.25,57.5 70.5,57.25 v1(71.5,57.25) ; H3.2 72.03,75.03 72.25,75.25 v1(74,75.25) ; H3.1 73.25,69.274 v1(73.25,66.25) 73.25,65.25 73.5,65 C4.2 ; v1(57.125,58.75) 57.125,58.42 v1(57.125,58.75)
  Bottom Layer w0.3: C15.2 30.45,56.95 30.75,57.25 v1(31.25,57.25) ; C11.2 31.432,58.75 31.75,59.067 v1(31.75,60) ; C12.2 v1(35.5,47.75) ; v2(38,58.75) 38.5,58.25 38.7,58.05 C14.2 ; C13.2 41.95,56.2 42.25,56.5 v2(42.25,56.75)
+5V: 5V.1 C3.2 C7.1 C10.1 D1.2 D2.2 H2.1 U3.1 U3.3 | length 31.8
  Top Layer w0.3: C10.1 20.5,77.25 21,77.75 v1(22,77.75) 22,75.75 ; U3.3 22.2,73.8 22,74 22,75.75 ; U3.1 22.05,75.7 22,75.75 ; H2.1 77.224,48.526 v1(78.25,47.5) C3.2 ; 5V.1 v1(81.25,46.75)
  Top Layer w0.75: v1(12.75,22) 12.75,23.25 13.35,23.85 C7.1 ; D1.2 v1(18.75,22)
  Bottom Layer w0.3: D2.2@13.5,74.975 D2.2@14.25,74.225
  Bottom Layer w0.75: D2.2@13.5,74.975 13.5,76.5 v1(14.5,77.5)
BAT_CHECK: "BAT check.1" R8.2 R10.2 U2.13 | length 47.9
  Top Layer w0.3: R10.2 2.3,37.25 2,37.55 2,40.25 3.625,41.875 5.375,41.875 5.75,42.25 5.75,44.75 5.75,47 9,50.25 14,50.25 16.25,48 v1(18,48) ; v1(26.25,52.25) 29.428,52.25 29.903,52.725 U2.13
  Top Layer w0.75: R8.2 R10.2
  Bottom Layer w0.3: v1(18,48) 20,48 24.25,52.25 v1(26.25,52.25)
ERASE: TP4.1 U2.55 | length 9.4
  Top Layer w0.3: U2.55 39.5,62 41,63.5 TP4.1
GND: "5V header.1" "5V reg.2" "GPIO and PWM Pins1.7" "GPIO and PWM Pins1.8" "GPIO and PWM Pins1.9" "GPIO and PWM Pins1.10" "VBAT header.1" Battery1.2 C1.1 C2.1 C3.1 C4.1 C5.1 C6.2 C7.2 C8.2 C9.2 C10.2 C11.1 C12.1 C13.1 C14.1 C15.1 C16.1 C17.1 C18.1 C19.1 C20.1 C21.1 GND.1@18,5.75 GND.1@56.25,45.75 GND.1@80.25,29 H1.5 H1.6 H1.7 H1.8 H1.9 H2.2 H2.6 H2.8 H3.4 H3.6 H3.8 H3.10 H3.12 H3.14 H3.16 H3.18 H3.20 IR.1 R10.1 R11.2 R16.2 R24.2 R26.1 R28.1 Servo.3 Speed.3 SW1.2 SW2.2 TP25.1 TP28.1 U2.2 U2.17 U2.40 U2.46 U2.50 U2.60 U3.2 U3.4 | length 236.4
  Top Layer w0.3: H1.7 3.45,60 3.95,59.5 v2(5.5,59.5) 7.05,59.5 7.55,60 H1.6 10.55,59.3 11.25,60 v1(11.25,62) 11.1,62.15 H1.5 ; H1.9 3.45,67.5 3.95,68 v2(5.5,68) 7.05,68 7.55,67.5 H1.8 ; R10.1 3,39.35 3.65,40 4.25,40 v1(5,39.25) ; TP28.1 v1(7.5,52.75) ; v1@10.7,22.55 v1(10.75,22.5) ; Battery1.2 v1(13.5,5.75) GND.1@18,5.75 ; C7.2@14.5,25 C7.2 ; R26.1 v1(18.5,73) 18.5,74.25 18.8,74.55 C10.2 ; SW1.2 v1(20.5,59.25) ; U3.2 24,74.75 24.25,74.5 24.25,73.8 ; v1(24.25,71.5) 24.25,73.8 ; v1(25.85,67.31) U3.4 ; U3.4@26.2,73.8 U3.4 ; U2.2 34.275,58.225 v2(35.5,57) 37,58.5 U2.60 ; v1(34.29,48.895) 35,48.895 U2.17 ; C9.2 35.3,72 v1(37.25,72) ; v1(37.75,24.75) v1@37.8,24.8 ; v1@40.45,9.8 v1(40.5,9.75) ; U2.50 42,61.939 v1(42.316,62.255) ; v2(42.316,57.912) 42.503,57.725 U2.46 ; v2(42.5,53.75) 42.5,54 43.225,54.725 U2.40 ; R11.2 43,74.5 43.5,75 v1(44.5,75) ; R16.2 v1(44.5,75) ; R24.2 46,74.5 45.5,75 v1(44.5,75) ; H3.20 49.17,76.67 49.75,77.25 v1(50.5,77.25) 51.25,77.25 51.71,76.79 H3.18 ; IR.1@50.96,4 51,4.04 v1(51,6.5) ; H3.16 54.25,76.75 54.75,77.25 v1(55.5,77.25) 56.25,77.25 56.79,76.71 H3.14 ; GND.1@56.25,45.75 56.25,47.25 57,48 v1(58.75,48) SW2.2 ; H3.12 59,74.58 59,76.75 59.5,77.25 v1(60.5,77.25) 61.5,77.25 61.87,76.88 H3.10 ; 63.229,38.434 60.816,38.434 60.5,38.75 v1(60.5,39.75) 60.5,40.75 60.807,41.057 63.229,41.057 ; H3.8 64.41,76.66 65,77.25 v1(65.75,77.25) 66.5,77.25 66.95,76.8 H3.6 ; 66.25,39.706 68.456,39.706 68.75,40 v1(68.75,41) 68.75,42 68.5,42.25 66.25,42.25 ; H3.4 69.5,74.26 v1(69.5,77.25) ; C4.1 v1(78.5,65) 79.75,65 80.25,65.5 TP25.1 ; v1(78.25,40.5) C3.1 ; H2.2 79.266,49.75 v1(82,49.75) ; H2.6 81.635,54.885 82,55.25 v1(82,56.25) 82,57 81.575,57.425 H2.8 ; GND.1@80.25,29 v1(80.25,31.75) ; 24.25,73.8 U3.4
  Top Layer w0.75: R28.1 v1(5,39.25) 5,40.75 5.45,41.2 C8.2 ; C6.2 v1@10.7,22.55 ; C5.1 v1(11.75,25.25) C7.2 ; v1(14.5,32.5) Servo.3 ; v1(24,32.5) Speed.3 ; v1@37.8,24.8 37.8,27.6 ; v1@40.45,9.8 40.45,13.6
  Bottom Layer w0.3: C21.1 18.7,59.8 19.25,59.25 v1(20.5,59.25) ; v1@24.25,71.469 v1(24.25,71.5) ; v1(25.85,67.31) 28.31,67.31 28.75,67.75 C2.1 ; v1(28.75,62.5) 30.396,62.5 C20.1 ; v1(29,66.25) C1.1 C1.1@30.3,66 ; C15.1 29,55.8 v1(29,57.25) 29.35,57.6 C11.1 C11.1@29.1,59 ; C20.1@30.502,62.702 C20.1@30.55,62.75 ; C12.1 32.8,48.578 33.117,48.895 v1(34.29,48.895) 35.242,49.847 38.797,49.847 C18.1 41.45,53.45 41.75,53.75 v2(42.5,53.75) 42,54.25 40.75,54.25 40.55,54.45 C13.1 39.25,55.5 39,55.25 ; v2(35.5,57) 35.75,57.25 C14.1 ; C17.1 38.75,53.25 39,53.5 v2(39,54.25) 39,55.25 ; C16.1 39,55.25 ; C19.1 42.112,57.912 v2@42.24,57.912 ; v2(42.316,57.912) v2@42.24,57.912 ; v1(42.316,62.255) 42.24,62.179 v2@42.24,57.912
IR: "IR signal.1" IR.4 U2.10 | length 73.9
  Top Layer w0.3: v1@30.15,54.15 v1(30.25,54.25) 33.2,54.25 U2.10 ; IR.4@54.77,4 54.655,4.115 v1(54.655,6.75) 54.655,6.905 56.75,9 60.5,9
  Bottom Layer w0.3: v1(30.25,54.25) 30,54.25 27.75,52 27.75,31.5 52.5,6.75 v1(54.655,6.75)
"IR SLEEP": "IR sleep.1" Q1.1 U2.25 | length 44.2
  Top Layer w0.3: U2.25 39,45.568 41.818,42.75 43.204,42.75 53.7,32.254 53.7,20.55 ; 49,20.5 49.05,20.55 53.7,20.55 ; Q1.1 55.1,19.15 53.7,20.55
LED1: DL1.2 U2.48 | length 14.2
  Top Layer w0.3: DL1.2 43,67.5 47.25,63.25 47.25,60 45.975,58.725 U2.48
LED2: DL2.2 U2.47 | length 14.6
  Top Layer w0.3: U2.47 46.225,58.225 47.75,59.75 47.75,64.25 44.5,67.5 DL2.2
LED3: DL3.2 U2.44 | length 15.7
  Top Layer w0.3: U2.44 45.975,56.725 48.25,59 48.25,65.242 46,67.492 DL3.2
"Net5V reg_3": "5V reg.3" D1.1 | length 14.4
  Top Layer w0.75: D1.1 21.775,12.025 22.5,12.75 22.5,23.05
NetBattery1_1: Battery1.1 F1.1 | length 12.2
  Top Layer w0.75: F1.1 5.25,21.75 9.75,17.25 Battery1.1
NetC1_2: C1.2 U2.62 Y1.3 | length 9.1
  Top Layer w0.15: v1(35.25,62.75) 36,62 U2.62
  Bottom Layer w0.2: Y1.3 34.8,63.2 v1(35.25,62.75)
  Bottom Layer w0.3: C1.2@32.066,66.25 C1.2 31.95,65.05 32.2,64.8 Y1.3
NetC2_2: C2.2 U2.61 Y1.1 | length 14
  Top Layer w0.3: U2.61 v1(36.5,63)
  Bottom Layer w0.3: C2.2 36,67.75 ; v1(36.5,63) 36,63.5 36,67.75 ; Y1.1 37.2,67.95 37,67.75 36,67.75
NetC20_2: C20.2 L2.1 R29.2 U2.64 | length 24.4
  Top Layer w0.3: v1(33.25,63.5) 35,61.75 U2.64
  Bottom Layer w0.3: R29.2 25.35,62.85 26.635,64.135 32.615,64.135 v1@33,63.75 ; L2.1 27.25,63.182 27.567,63.5 v1(33.25,63.5) 33.25,63.4 32.6,62.75 C20.2@31.95,62.75
NetC21_2: C21.2 R29.1 | length 3.3
  Bottom Layer w0.3: C21.2 20.3,60.95 20.55,60.7 22.6,60.7 R29.1
"NetChoose header spare 1_2": "5V header.2" Q2.2 | length 4.5
  Top Layer w0.75: Q2.2 36.25,24.25 36.55,24.55 36.55,27.6
"NetChoose header spare batt1_2": "VBAT header.2" Q3.2 | length 5.8
  Top Layer w0.75: Q3.2 38.65,9.15 39.2,9.7 39.2,13.6
NetD2_1: D2.1 L1.2 | length 11.7
  Top Layer w0.75: L1.2 16.75,74.5 17.25,74 v1(17.25,72.75)
  Bottom Layer w0.75: D2.1@14.25,67.275 16.025,67.275 17.25,68.5 v1(17.25,72.75)
NetDL1_1: DL1.1 R11.1 | length 1.8
  Top Layer w0.3: DL1.1 R11.1
NetDL2_1: DL2.1 R16.1 | length 1.8
  Top Layer w0.3: DL2.1 R16.1
NetDL3_1: DL3.1 R24.1 | length 1.8
  Top Layer w0.3: DL3.1 R24.1
"NetGPIO and PWM Pins1_1": "GPIO and PWM Pins1.1" R12.2 | length 4.5
  Top Layer w0.3: R12.2 63.177,30.75 63.229,30.802
"NetGPIO and PWM Pins1_2": "GPIO and PWM Pins1.2" R13.1 | length 4.5
  Top Layer w0.3: 66.25,32.074 70.676,32.074 R13.1
"NetGPIO and PWM Pins1_3": "GPIO and PWM Pins1.3" R14.1 | length 4.5
  Top Layer w0.3: R14.1 58.904,33.346 63.229,33.346
"NetGPIO and PWM Pins1_4": "GPIO and PWM Pins1.4" R15.1 | length 4.5
  Top Layer w0.3: 66.25,34.618 70.632,34.618 R15.1
"NetGPIO and PWM Pins1_5": "GPIO and PWM Pins1.5" R18.1 | length 4.5
  Top Layer w0.3: R18.1 63.119,36 63.229,35.89
"NetGPIO and PWM Pins1_6": "GPIO and PWM Pins1.6" R17.1 | length 4.6
  Top Layer w0.3: 66.25,37.162 66.412,37 R17.1
NetLM1_1: LM1.1 R27.1 R28.2 | length 49.1
  Top Layer w0.75: R28.2 R27.1 v1(8,33.25) ; v1(25.75,9) 26.5,9 26.95,9.45 LM1.1@26.95,12.85
  Bottom Layer w0.75: v1(8,33.25) 8,31.75 9,30.75 20.75,30.75 24.25,27.25 24.25,9.5 24.75,9 v1(25.75,9)
NetQ1_2: "IR VCC.1" IR.3 Q1.2 | length 16.3
  Top Layer w0.3: IR.3@53.5,4 53.385,4.115 53.385,8.885 54.25,9.75 54.25,14 54.25,17 55.1,17.85 Q1.2
NetQ4_2: Q4.2 Speed.2 | length 9.6
  Top Layer w0.75: Q4.2 21.4,31.4 22,32 22,37.25 22.75,38 Speed.2
NetQ4_3: Q4.3 R9.1 | length 13
  Top Layer w0.75: R9.1 Q4.3
NetR1_1: "SRV PWM.1" R1.1 Servo.1 | length 23.4
  Top Layer w0.3: 13,46.75 13,44.25 14.5,42.75 ; Servo.1 14.5,42.75 ; R1.1 28.25,47.75 25.25,44.75 16.5,44.75 14.5,42.75
NetR2_1: R2.1 Sleep.1 U2.16 | length 13.1
  Top Layer w0.3: Sleep.1@24,46.75 25.5,46.75 26.75,48 R2.1 v1(28.75,49.5) ; v1(30.25,51.5) 30.525,51.225 U2.16
  Bottom Layer w0.3: v1(28.75,49.5) 28.75,51 29.25,51.5 v1(30.25,51.5)
NetR2_2: R2.2 SW1.1 | length 5
  Top Layer w0.3: SW1.1 23,50 23.5,49.5 R2.2
NetR3_2: R3.2 U2.57 | length 3
  Top Layer w0.15: R3.2 38,62.5 38.5,62 U2.57
NetR4_2: R4.2 U2.56 | length 2.9
  Top Layer w0.15: U2.56 39,62.25 39.25,62.5 R4.2
NetR5_1: "SP PWM.1" R5.1 U2.41 | length 31.4
  Top Layer w0.3: R5.1 v1(34,43) 34,39.25 ; U2.41@44.3,55.25 U2.41 48.725,55.225 v1(48.75,55.25)
  Bottom Layer w0.3: v1(34,43) 37.822,43 48.75,53.928 v1(48.75,55.25)
NetR5_2: R5.2 Speed.1 | length 7.9
  Top Layer w0.3: Speed.1 24,42 25,43 R5.2
NetR6_2: R6.2 R7.2 U2.31 | length 31.6
  Top Layer w0.3: U2.31 42,47.25 43,46.25 v1(43,46) ; v2(60,53.75) R7.2 R6.2
  Bottom Layer w0.3: v1(43,46) 50,46 57.75,53.75 v2(60,53.75)
NRST: H3.15 R19.1 SW2.1 TP14.1 U2.39 | length 36.5
  Top Layer w0.3: U2.39 45.766,54.225 46.176,54.635 47.324,54.635 47.734,54.225 55.975,54.225 57.08,55.33 ; v1(53.5,55.33) 57.08,55.33 ; v1(53.5,57.5) 53.5,59.458 ; R19.1 54.292,60.25 53.5,59.458 ; TP14.1 55.25,61.5 53.5,59.75 53.5,59.458 ; SW2.1 57.08,55.33
  Top Layer w0.5: TP14.1 55.25,66.5 55.52,66.77 H3.15
  Bottom Layer w0.3: v1(53.5,55.33) v1(53.5,57.5)
P1: R12.1 U2.29 | length 26.8
  Top Layer w0.3: U2.29 41,46.114 42.564,44.55 43.95,44.55 55.5,33 55.5,31.5 56.25,30.75 R12.1
P2: R13.2 U2.28 | length 44.9
  Top Layer w0.3: U2.28 40.5,45.977 42.377,44.1 43.764,44.1 55.05,32.814 55.05,31.314 56.614,29.75 72,29.75 72.25,30 R13.2
P3: R14.2 U2.30 | length 24.2
  Top Layer w0.3: U2.30 41.5,46.25 42.75,45 44.25,45 55.75,33.5 R14.2
PWM1: R1.2 U2.37 | length 23.6
  Top Layer w0.3: v1(30.5,46) R1.2 ; U2.37 46.025,53.225 46.05,53.25 v1(46.75,53.25)
  Bottom Layer w0.3: v1(30.5,46) 39.75,46 46.75,53 v1(46.75,53.25)
SCL: H2.5 R6.1 SCL.1 U2.36 | length 35.2
  Top Layer w0.3: U2.36 45.525,52.725 45.935,52.315 59.434,52.315 59.669,52.55 61.95,52.55 63.75,50.75 R6.1 ; SCL.1 R6.1 ; H2.5 74.174,53.5 72.25,53.5 69.5,50.75 R6.1
SDA: H2.7 R7.1 SDA.1 U2.43 | length 34.5
  Top Layer w0.3: U2.43 54.975,56.225 56.7,57.95 64.8,57.95 66,56.75 66,56.25 ; R7.1 66,56.25 ; SDA.1@69,54.5 69,56.155 ; 69,56.25 69,56.155 ; H2.7 69,56.155 ; 66,56.25 66.095,56.155 69,56.155
"SERVO POWER": C8.1 LM1.2 LM1.4 Q2.3 R27.2 Servo.2 | length 55.2
  Top Layer w0.3: 8,38 8.04,37.96 ; 22.5,39.25 25.25,39.25
  Top Layer w0.75: R27.2 8,38 C8.1 ; 8.04,37.96 Servo.2 18.71,37.96 20,39.25 22.5,39.25 ; 25.25,39.25 29,39.25 31,37.25 31,24 31.4,23.6 ; LM1.2@29.25,12.85 29.25,22.75 30.1,23.6 31.4,23.6 ; Q2.3 31.4,23.6
SPARE: Q3.1 U2.22 | length 49.3
  Top Layer w0.3: Q3.1 40.35,7.85 44.75,12.25 44.75,25 43.282,26.468 43.282,40.65 37.5,46.432 U2.22
SPARE2: Q2.1 U2.21 | length 34.5
  Top Layer w0.3: Q2.1 39.45,22.95 42.832,26.332 42.832,40.464 37,46.295 U2.21
"SPEED SLEEP": Q4.1 U2.38 | length 46.4
  Top Layer w0.3: Q4.1 26.1,30.1 v1(29.75,33.75) ; U2.38 45.903,53.725 46.363,54.185 47.137,54.185 48.072,53.25 v1(50.25,53.25)
  Bottom Layer w0.3: v1(29.75,33.75) 29.619,33.75 49.119,53.25 v1(50.25,53.25)
SPIN1: R15.2 U2.27 | length 50
  Top Layer w0.3: U2.27 40,45.841 42.191,43.65 43.577,43.65 54.6,32.627 54.6,31.127 56.427,29.3 72.186,29.3 73.25,30.364 73.25,34.25 73,34.5 R15.2
SPIN2: R18.2 U2.32 | length 21.3
  Top Layer w0.3: U2.32 42.5,47.75 54.25,36 R18.2
SPIN3: R17.2 U2.26 | length 54.2
  Top Layer w0.3: U2.26 39.5,45.704 42.004,43.2 43.391,43.2 54.15,32.441 54.15,30.941 56.241,28.85 72.373,28.85 73.7,30.177 73.7,36.3 73,37 R17.2
TCK: H3.9 R21.1 TP16.1 U2.53 | length 32.9
  Top Layer w0.3: U2.53 40.5,59.436 40.525,59.411 44.882,59.411 v1(45.466,59.995) ; v1(61,60.25) R21.1 TP16.1
  Top Layer w0.5: TP16.1 62.75,66.25 63.14,66.64 H3.9
  Bottom Layer w0.3: v1(45.466,59.995) 45.721,60.25 v1(61,60.25)
TDI: H3.5 R23.1 TP18.1 U2.33 | length 42.2
  Top Layer w0.3: U2.33 45.026,51.225 45.551,51.75 v2(61.25,51.75) ; H3.5 68.22,67.03 68.75,66.5 70,66.5 70.25,66.25 TP18.1 v1(70.25,61.25) R23.1
  Bottom Layer w0.3: v2(61.25,51.75) 63.25,51.75 70.25,58.75 v1(70.25,61.25)
TDO: H3.13 R20.1 TP15.1 U2.49 | length 26.4
  Top Layer w0.3: U2.49 43.25,60.5 44.25,61.5 v1(45.5,61.5) ; R20.1 v1(59,61.5) TP15.1
  Top Layer w0.5: H3.13 58.06,66.81 59,65.87 TP15.1
  Bottom Layer w0.3: v1(45.5,61.5) v1(59,61.5)
TMS: H3.7 R22.1 TP17.1 U2.51 | length 37.4
  Top Layer w0.3: U2.51 41.5,62.909 41.91,63.319 44.431,63.319 44.758,62.992 v1(46.279,62.992) ; v1(64.742,62.992) 65.742,62.992 TP17.1 ; H3.7 65.68,64.57 TP17.1 ; R22.1 TP17.1
  Bottom Layer w0.3: v1(46.279,62.992) v1(64.742,62.992)
"USB DETECT": R25.1 R26.2 U2.35 | length 44.4
  Top Layer w0.3: R26.2 R25.1 22.25,67.5 v1(24,65.75) ; v1(24,62.5) 24,50.5 33.751,50.5 35.476,52.225 U2.35
  Bottom Layer w0.3: v1(24,62.5) v1(24,65.75)
USB_N: H1.2 R4.1 TP6.1 | length 36.3
  Top Layer w0.381: H1.2 14,64.55 ; TP6.1 14,64.55 ; R4.1 39.135,66.365 38.25,67.25 28.5,67.25 25.8,64.55 14,64.55
USB_P: H1.3 R3.1 TP8.1 | length 32.3
  Top Layer w0.381: H1.3 14,63.75 ; TP8.1 14,63.75 ; R3.1 27.25,64.75 26.25,63.75 14,63.75
VBAT: "5V reg.1" C5.2 C6.1 F1.2 GND.1@31.75,5.5 LM1.3 Q3.3 R8.1 R9.2 TP20.1 | length 24.4
  Top Layer w0.3: C5.2@11.7,28.5 C5.2 ; v1@13.45,28.45 v1(13.5,28.5) ; v1@31.594,8.5 v1@31.672,8.578
  Top Layer w0.75: R8.1 v1(5,32.75) ; F1.2 6.8,26.7 7.5,26 v1(8.75,26) ; R9.2 v1(6.75,29.25) ; C6.1 v1(8.75,26) ; TP20.1 v1(8.75,26) ; C5.2 v1@13.45,28.45 ; v1@31.672,8.578 LM1.3 ; GND.1@31.75,5.5 v1(31.75,8.5) Q3.3
VBUS: H1.1 L1.1 R25.2 TP21.1 | length 32
  Top Layer w0.75: H1.1 10.1,65.35 11.5,66.75 11.5,71.5 ; TP21.1@11.5,75.25 11.5,71.5 ; v1(17.5,67) 17.5,68 14.75,70.75 L1.1 11.5,71.5 ; v1(21,72.75) 22,72.75 22.25,72.5 R25.2
  Bottom Layer w0.75: v1(17.5,67) 19,67 21,69 v1(21,72.75)
VDDOUT: C16.2 C17.2 C18.2 C19.2 L2.2 TP23.1 U2.8 U2.12 U2.24 U2.54 | length 51.8
  Top Layer w0.3: TP23.1 26.25,54.75 27.775,53.225 U2.12 34.475,53.225 34.975,53.725 v2(34.975,55.225) U2.8 ; U2.24 v2(38.5,51.25) ; v2(39.75,58.75) 39.567,58.75 39.5,58.817 40,59.317 U2.54
  Bottom Layer w0.3: L2.2 30.3,60.8 39.2,60.8 39.75,60.25 v2(39.75,58.75) ; v2(34.975,55.225) 34.975,54.927 35.298,55.25 v2@35.42,55.25 ; C17.2 36.031,55.25 C16.2 v2@35.42,55.25 ; v2(38.5,51.25) 38.8,51.25 C18.2 38.75,52.5 38.5,52.25 35.5,52.25 35,52.75 35,54.83 v2@35.42,55.25 ; C19.2 40.3,58.2 v2(39.75,58.75) ; v2@35.42,55.25 36.42,56.25 39.25,56.25 39.75,56.75 v2(39.75,58.75)
pads on no net: "5V header.M" "VBAT header.M" H1.4 H1.MH1 H1.MH2 H2.3 H2.4 H2.9 H2.10 H3.3 H3.11 H3.17 H3.19 IR.2 MT1.1 MT2.1 MT3.1 MT4.1 U2.3 U2.4 U2.5 U2.6 U2.9 U2.11 U2.14 U2.15 U2.19 U2.20 U2.23 U2.34 U2.42 U2.52 U2.59 U2.63 Y1.2 Y1.4

## Polygon pours and split planes (outlines as drawn)
GND on Gnd (split plane): 84.49,0.51 0.51,0.51 0.51,79.49 84.49,79.49
VBAT on DC Power (split plane): 37.871,15.696 37.871,0.51 0.51,0.51 0.51,20.241 20.25,20.241 20.3,20.251 20.342,20.279 20.37,20.321 20.379,20.371 20.379,23.75 20.37,23.8 20.342,23.842 20.3,23.87 20.25,23.879 3.629,23.879 3.629,33.871 19.696,33.871
+3V3 on DC Power (split plane): 74.871,45 74.88,44.95 74.908,44.908 74.95,44.88 75,44.871 84.49,44.871 84.49,0.51 38.129,0.51 38.129,15.75 38.12,15.8 38.092,15.842 19.842,34.092 19.8,34.12 19.75,34.129 3.629,34.129 3.629,70.196 7.054,73.621 22,73.621 22.05,73.63 22.092,73.658 22.12,73.7 22.129,73.75 22.129,76.621 74.871,76.621
+5V on DC Power (split plane): 84.49,45.13 75.129,45.13 75.129,76.75 75.12,76.8 75.092,76.842 75.05,76.87 75,76.88 22,76.88 21.95,76.87 21.908,76.842 21.88,76.8 21.871,76.75 21.871,73.88 7,73.88 6.95,73.87 6.908,73.842 3.408,70.342 3.38,70.3 3.371,70.25 3.371,23.75 3.38,23.7 3.408,23.658 3.45,23.63 3.5,23.621 20.121,23.621 20.121,20.5 0.51,20.5 0.51,79.49 84.49,79.49

## Keep-outs
Keep-Out Layer:
  lines w0.3: 1.3,56 1.3,1.3 83.7,1.3 83.7,78.7 1.3,78.7 1.3,71.25

## Other copper
DC Power (plane layer: these items are gaps in the copper):
  lines w0.254: 0.379,20.371 20.25,20.371 20.25,23.75 12.25,23.75 8.25,23.75 3.5,23.75 3.5,70.25 7,73.75 22,73.75 22,76.75 75,76.75 75,45 85,45 ; 3.5,34 19.75,34 38,15.75 38,0 ; 9.3,80 9.75,80

## Silkscreen, mask and mechanical layers (free items; w line width, h text height)
Top Overlay:
  text "Group 7" at 64.75,22.25 h4
  text "Motor Board / Jono Kapene / Neeraj Patel / Hugh Paterson" at 64.75,10.25 h3
PCB Boundary:
  the board outline again, w0.3

## Dimensions
0,0 to 85,0 on Dimension
0,0 to 0,80 on Dimension

## Text inside footprints (layer, text, board x,y; h text height)
H1: Dimension "PCB Edge" at 0.068,67.786 h0.6 r270
Servo: Top Overlay "1" at 10.055,39.865 h0.6
Speed: Top Overlay "1" at 19.555,39.905 h0.6